# Altium PCB IoT_6LoWPAN_gateway_v01.PcbDoc
Units mm, origin at the board's own origin, x right, y up, seen from the top; angles counter-clockwise.
Board outline 85.03 x 54.05 mm, 2 copper layers (Top, Bottom), stack 1.57 mm thick; 48 components, 55 nets, 189 pads, 17 vias.
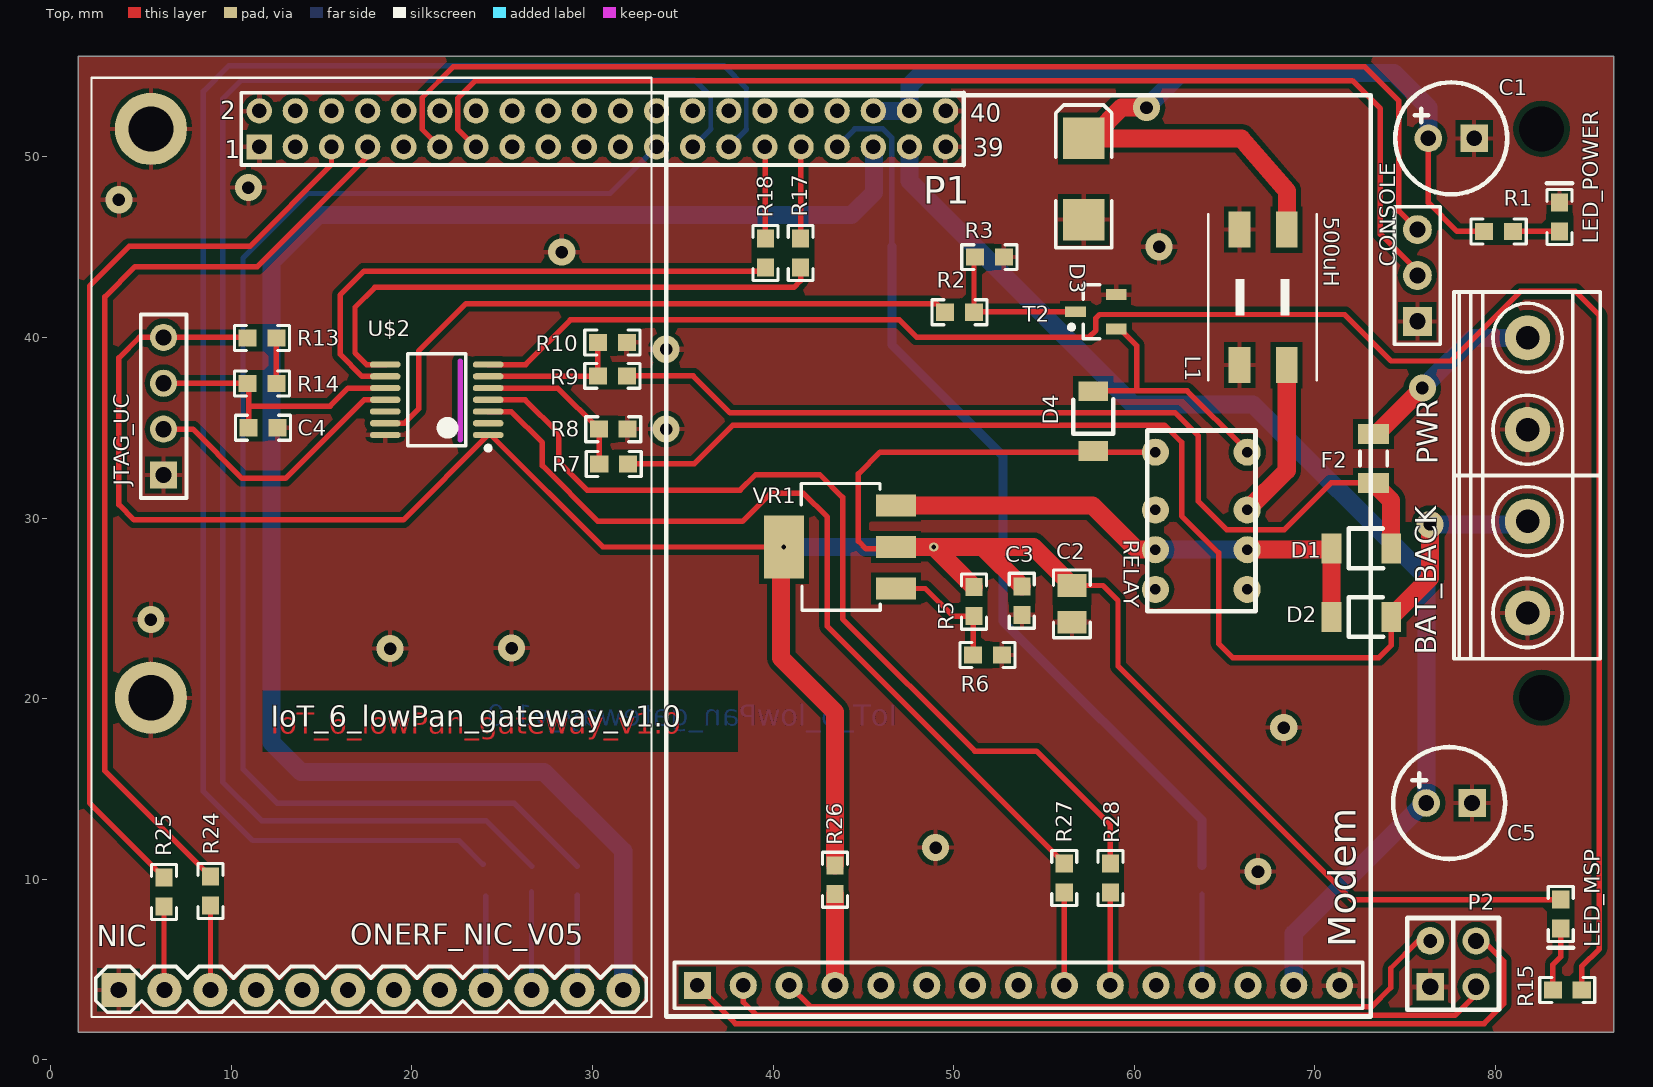
[diagram p0: Top view]
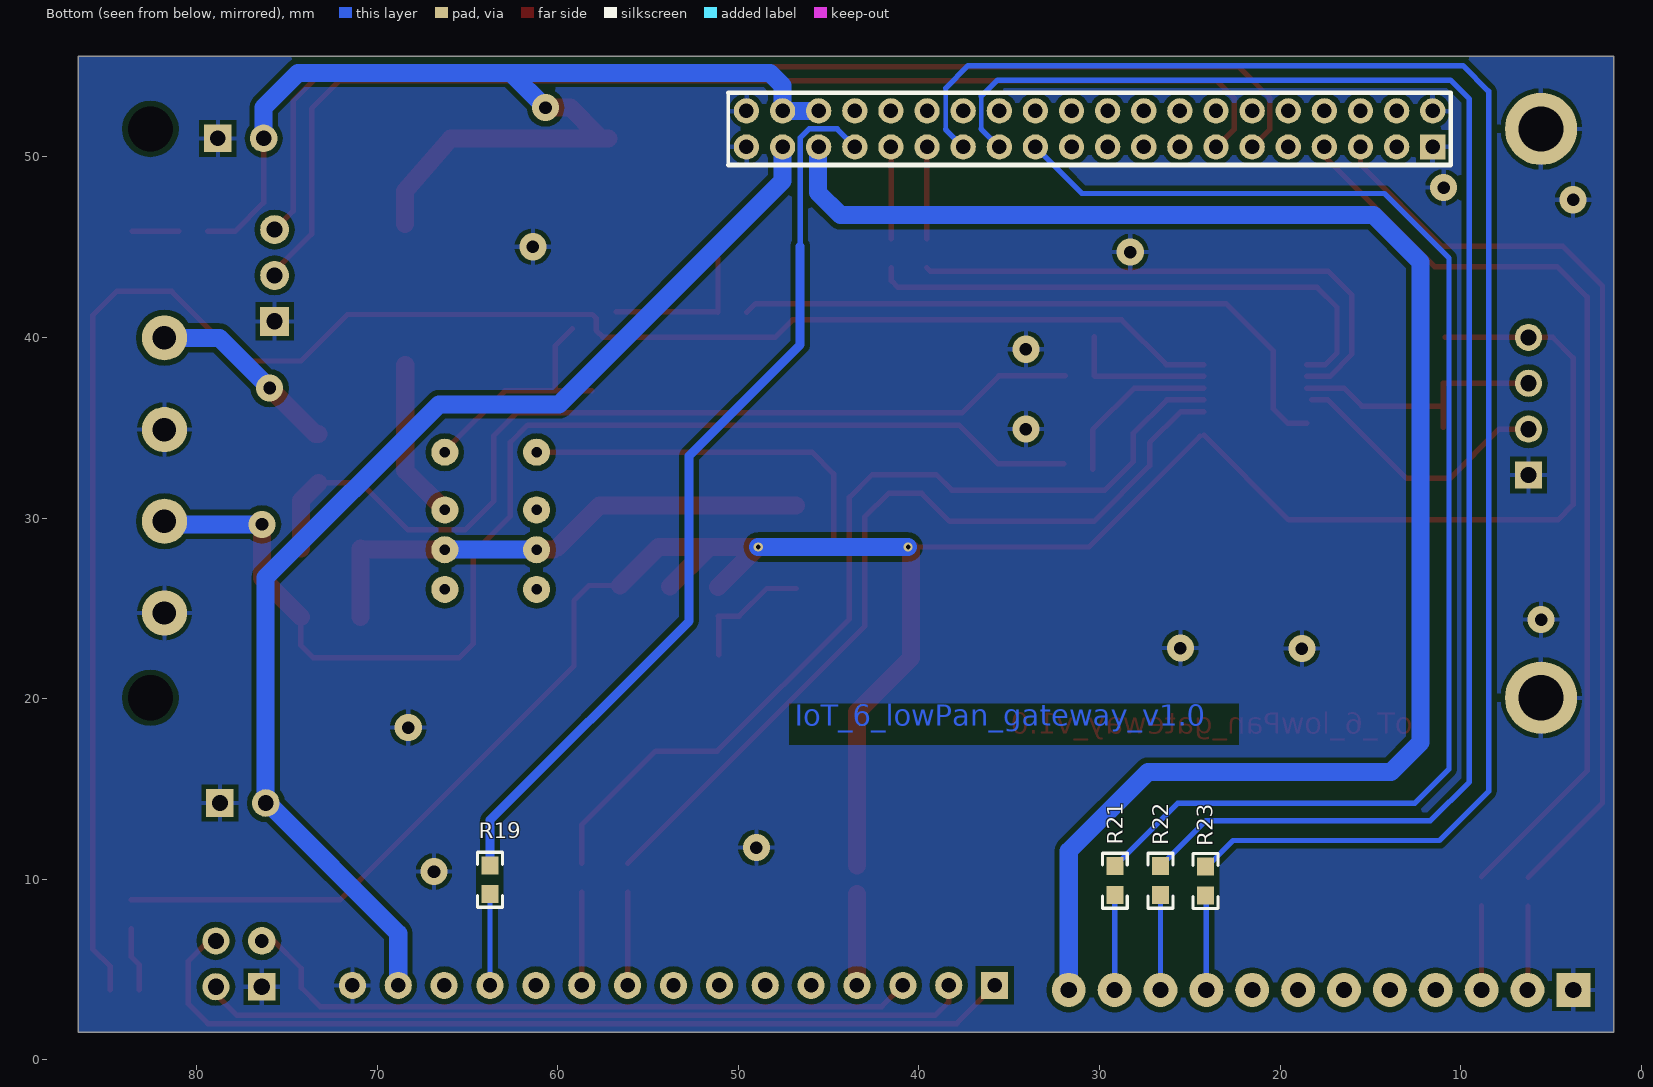
[diagram p1: Bottom view, seen from below]

## Layer stack, top to bottom
Top Solder: solder mask 0.0102, Solder Resist, Dk 3.5
Top: signal copper 0.035
Dielectric 1: core 1.5, FR-4, Dk 4.8
Bottom: signal copper 0.035
Bottom Solder: solder mask 0.0102, Solder Resist, Dk 3.5

## Board outline
1.525,1.525 86.55,1.525 86.55,55.575 1.525,55.575

## Design rules (kind name [scope] priority, off if disabled: settings)
Clearance Clearance_1 [All] p1: gap=0.3
Clearance GroundPlane [InPolygon] p2: gap=0.5
Clearance "Clearance (Same Net)" [All] p3: gap=0.3
HoleSize HoleSize_1 [All] p1: absolutevalues=TRUE maxlimit=2540 minlimit=0.381 maxpercent=80.000 minpercent=20.000
HoleSize [All] p2: absolutevalues=TRUE maxlimit=2.54 minlimit=0.025 maxpercent=80.000 minpercent=20.000
HoleToHoleClearance mdViaViaSameLayer [All] p1: gap=0.203 allowstackedmicrovias=TRUE
HoleToHoleClearance [All] p2: gap=0.254 allowstackedmicrovias=TRUE
PasteMaskExpansion mlMinCreamFrame [All] p1: expansion=0
PasteMaskExpansion [All] p2: expansion=0
PlaneClearance [All] p1: clearance=0.5
PolygonConnect ThermalVias [IsVia] p1: connectstyle=Relief reliefconductorwidth=0.254 reliefentries=4 polygonreliefangle="90 Angle" airgapwidth=0.254
PolygonConnect [All] p2: connectstyle=Relief reliefconductorwidth=0.254 reliefentries=4 polygonreliefangle="90 Angle" airgapwidth=0.254
RoutingVias [All] p1: holewidth=0.711 width=1.27 viastyle="Through Hole" minholewidth=0.711 minwidth=1.27 maxholewidth=0.711 maxwidth=1.27
SilkToSilkClearance [All] p1 off: silktosilkclearance=0.254
SilkToSolderMaskClearance [IsPad] p1 off: minsilkscreentomaskgap=0.254 clearancetoexposedcopper=TRUE
SolderMaskExpansion mlMinStopFrame [All] p1: expansion=0.051
SolderMaskExpansion [All] p2: expansion=0.102
Width Width_1 [All] p1: maxlimit=2540 minlimit=0.3 preferedwidth=0.3
Width [All] p2 off: maxlimit=0.254 minlimit=0.254 preferedwidth=0.254
24 further rules are at their usual default settings.

## Components (designator, comment, footprint, x,y, rotation, side; value= is the part's Value field where it differs from the comment)
BAT_BACK "MKDSN1,5/2-5,08" MKDSN1,5/2-5,08 81.75,27.264 r270 top
C1 "470uF/10V/105C" E2,5-6,3 77.55,51.025 r0 top
C2 "C2012X5R1C226K125AC" 0805_HV 56.55,25.25 r270 top
C3 "CL10B222KB8SFNC" 0603 53.775,25.425 r90 top
C4 "0.1uF" 0603 11.75,35 r0 top
C5 "470uF/10V/105C" E2,5-6,3 77.43,14.225 r0 top
CONSOLE "Header 3" HDR1X3 75.675,40.895 r90 top
D1 "Diode" SOD-80 72.575,28.325 r180 top
D2 "Diode" SOD-80 72.575,24.525 r180 top
D3 "Diode TVS" SMB 57.2,48.775 r90 top
D4 "Diode" SOD-80 57.725,35.375 r270 top
F2 "2A Fast" C1206 73.25,33.3 r270 top
JTAG_UC "CONECTOR_1X042.54MM" HDR1X4 6.25,32.385 r90 top
L1 "500uH" WE-SL2_74422... 67.1,42.225 r90 top
LED_MSP "LED/WHITE/0603" LED0603 83.55,8.887 r180 top
LED_POWER "LED/Red/0603" LED0603 83.61,45.863 r0 top
Modem "oneRF_Modem_v01" ONERF_MODEM_V01 35.81,4.125 r0 top (schematic designator Mod)
NIC "ONERF_NIC_V05" ONERF_NIC_V05 2.265,2.375 r0 top
P1 "Header 20X2" HDR2X20 11.55,50.55 r0 top
P2 "Header 2x2 2.54" HEADER2X2(2.54) 76.385,4.05 r0 top
PWR "MKDSN1,5/2-5,08" MKDSN1,5/2-5,08 81.75,37.419 r270 top
R1 "CRCW06031K00FKEA" 0603 80.175,45.875 r180 top
R2 "CRCW06031K00FKEA" 0603 50.325,41.4 r180 top
R3 "CRCW06031K00FKEA" 0603 51.975,44.45 r180 top
R5 "CRCW06031K00FKEA" 0603 51.125,25.375 r270 top
R6 "RC0603FR-071K6L" 0603 51.875,22.425 r0 top
R7 "CRCW06031K00FKEA" 0603 31.175,33 r0 top
R8 "CRCW06031K00FKEA" 0603 31.15,34.925 r180 top
R9 "CRCW06031K00FKEA" 0603 31.1,37.875 r0 top
R10 "CRCW06031K00FKEA" 0603 31.1,39.725 r180 top
R13 "CRCW06031K00FKEA" 0603 11.7,39.975 r180 top
R14 "CRCW06031K00FKEA" 0603 11.7,37.45 r0 top
R15 "CRCW06031K00FKEA" 0603 83.975,3.875 r180 top
R17 "CRCW06031K00FKEA" 0603 41.525,44.675 r270 top
R18 "CRCW06031K00FKEA" 0603 39.575,44.675 r270 top
R19 "CRCW06031K00FKEA" 0603 63.752,9.975 r270 bottom
R21 "CRCW06031K00FKEA" 0603 29.152,9.925 r270 bottom
R22 "CRCW06031K00FKEA" 0603 26.627,9.925 r270 bottom
R23 "CRCW06031K00FKEA" 0603 24.127,9.9 r270 bottom
R24 "CRCW06031K00FKEA" 0603 8.85,9.35 r270 top
R25 "CRCW06031K00FKEA" 0603 6.275,9.3 r270 top
R26 "CRCW06031K00FKEA" 0603 43.425,9.975 r270 top
R27 "CRCW06031K00FKEA" 0603 56.125,10.075 r270 top
R28 "CRCW06031K00FKEA" 0603 58.675,10.075 r270 top
RELAY "1-1462039-5" 1-1462039-5 61.17,33.65 r270 top
T2 "BC817-40" SOT23_N 57.875,41.425 r180 top
U$2 "MSP430G2231" PW014_N 21.375,36.55 r180 top
VR1 "Voltage Regulator" SOT223 46.769,26.135 r90 top

## Footprints (in the part's own frame and the unit in brackets; to place one, negate y for a bottom-side part, rotate by r counter-clockwise, add the part's x,y. Pads: shape width x height; smd on the part's side, far side on the other; paste and mask are expansions set on the pad)
1-1462039-5 [mm] "Rele 1-1462039-5"
  round 1.5 hole 0.58: 1(0,0) 2(3.2,0) 3(5.4,0) 4(7.6,0) 5(7.6,5.08) 6(5.4,5.08) 7(3.2,5.08) 8(0,5.08)
  silkscreen extent -1.2,-0.46 8.8,5.54
0603 [mm]
  rect 1x0.95 smd: 1(-0.8,0) 2(0.8,0)
  silkscreen extent -1.52,-0.69 1.52,0.69, body extent -0.87,-0.47 0.87,0.47, height 0.85
0805_HV [mil]
  rect 50x63 smd: 1(-40,0) 2(40,0)
  silkscreen extent -74,-40 74,40, body extent -43,-29 43,29, height 43
C1206 [mm] "Chip Capacitor, Body 3.2x1.6mm, IPC High Density"
  rect 1.1x1.7 smd: 1(-1.35,0) 2(1.35,0)
  silkscreen extent -0.4,-0.75 0.4,0.75, body extent -1.7,-0.9 1.7,0.9, height 1.3
E2,5-6,3 [mil] "E2,5-6,3"
  round 60 hole 34: +(-50,0)
  rect 60x60 hole 34: -(50,0)
  silkscreen extent -122,-122 122,122
HDR1X3 [mm] "Connector; Header; 3 Position"
  rect 1.6x1.6 hole 0.9: 1(0,0)
  round 1.6 hole 0.9: 2(2.54,0) 3(5.08,0)
  silkscreen extent -1.27,-1.27 6.35,1.27
HDR1X4 [mm] "Connector; Header; 4 Position"
  rect 1.5x1.5 hole 0.9: 1(0,0)
  round 1.5 hole 0.9: 2(2.54,0) 3(5.08,0) 4(7.62,0)
  silkscreen extent -1.27,-1.27 8.89,1.27
HDR2X20 [mm] "Connector; Header; 20x2 Position"
  rect 1.4x1.4 hole 0.8: 1(0,0)
  round 1.4 hole 0.8: 2(0,2) 3(2,0) 4(2,2) 5(4,0) 6(4,2) 7(6,0) 8(6,2) 9(8,0) 10(8,2) 11(10,0) 12(10,2) 13(12,0) 14(12,2) 15(14,0) 16(14,2) 17(16,0) 18(16,2) 19(18,0) 20(18,2) 21(20,0) 22(20,2) 23(22,0) 24(22,2) 25(24,0) 26(24,2) 27(26,0) 28(26,2) 29(28,0) 30(28,2) 31(30,0) 32(30,2) 33(32,0) 34(32,2) 35(34,0) 36(34,2) 37(36,0) 38(36,2) 39(38,0) 40(38,2)
  silkscreen extent -1,-1 39,3
HEADER2X2(2.54) [mm]
  rect 1.5x1.5 hole 0.9: 1(0,0)
  round 1.524 hole 0.762: 2(0,2.54)
  round 1.5 hole 0.9: 3(2.54,0) 4(2.54,2.54)
  silkscreen extent -1.27,-1.27 3.81,3.81
LED0603 [mm]
  rect 0.95x1 smd: 1(-0.06,0.012) 2(-0.06,1.612)
  silkscreen extent -0.76,-0.71 0.63,2.67, body extent -0.53,-0.06 0.41,1.69, height 0.85
MKDSN1,5/2-5,08 [mm] "MKDSN1,5/2-5,08"
  round 2.5 hole 1.3: 1(-2.561,0.025) 2(2.519,0.025)
  silkscreen extent -5.1,-4.05 5.06,4.05
ONERF_MODEM_V01 [mm] "oneRF_Modem_v01"
  rect 1.5x1.5 hole 0.8: 1(0,0)
  round 1.5 hole 0.8: 2(2.54,0) 3(5.08,0) 4(7.62,0) 5(10.16,0) 6(12.7,0) 7(15.24,0) 8(17.78,0) 9(20.32,0) 10(22.86,0) 11(25.4,0) 12(27.94,0) 13(30.48,0) 14(33.02,0) 15(35.56,0)
  silkscreen extent -1.72,-1.72 37.28,49.28
ONERF_NIC_V05 [mil] "ONERF_NIC_V05"
  rect 74x74 hole 35.43: 0(59.06,59.06)
  round 74 hole 35.43: 1(159.06,59.06) 2(259.06,59.06) 3(359.06,59.06) 4(459.06,59.06) 5(559.06,59.06) 6(659.06,59.06) 7(759.06,59.06) 8(859.06,59.06) 9(959.06,59.06) 10(1059.06,59.06) 11(1159.06,59.06)
  silkscreen extent 0,0 1220,2047
PW014_N [mm] "TSOP, 14-Leads, Body 5x4.4mm, Pitch 0.65mm, IPC Medium Density"
  oval 1.7x0.35 smd: 1(-2.85,1.95) 2(-2.85,1.3) 3(-2.85,0.65) 4(-2.85,0) 5(-2.85,-0.65) 6(-2.85,-1.3) 7(-2.85,-1.95) 8(2.85,-1.95) 9(2.85,-1.3) 10(2.85,-0.65) 11(2.85,0) 12(2.85,0.65) 13(2.85,1.3) 14(2.85,1.95)
  silkscreen extent -2.98,-2.55 1.6,2.8, body extent -2.25,-2.55 2.25,2.55, height 1.2
SMB [mm] "DO-214-AA/SMB; 2 C-Bend Leads; Body 5.3 x 3.6 mm, inc. leads (LxW)"
  rect 2.3x2.3 smd: 1(-2.25,0) 2(2.25,0)
  silkscreen extent -3.8,-1.55 4.1,1.55
SOD-80 [mm]
  rect 1.1x1.65 smd: 1(-1.65,0) 2(1.65,0)
  silkscreen extent -1.2,-1.1 0.7,1.1, body extent -1.86,-1.5 1.79,1.5, height 3.5
SOT23_N [mm] "SOT23, 3-Leads, Body 2.9x1.3mm, Pitch 0.95mm, Lead Span 2.3mm - Reverse Pinning, IPC Medium Density"
  rect 1.15x0.6 smd: 1(1.125,0) 2(-1.125,-0.95) 3(-1.125,0.95)
  silkscreen extent -0.2,-1.5 1.47,1.5, body extent -0.7,-1.5 0.7,1.5, height 1.1
SOT223 [mm] "SOT223 - Regulador"
  rect 1.2x2.2 smd: 1(-0.035,-0.031) 2(2.265,-0.031) 3(4.565,-0.031)
  rect 3.5x2.2 smd: 2(2.265,6.169)
  silkscreen extent -1.23,0.83 5.78,5.2, body extent -0.97,-0.6 5.43,6.72, height 1.8
WE-SL2_74422... [mm] "WE-SL2_74422..."
  rect 2x1.2 smd: 1(-3.75,1.27) 2(-3.75,-1.34) 3(3.75,-1.34) 4(3.75,1.27)
  silkscreen extent -4.6,-3 4.6,3

## Part data
BAT_BACK PWR: "MKDSN 1,5/ 2-5,08 Printklemme   Nennstrom: 13,5 A Nennspannung: 250 V Rastermaß: 5,08 mm Polzahl: 2 Anschlussart: Schraubanschluss Montage: Löten Anschlussrichtung Leiter/Platine: 0 ° Artikelnummer: 1729128 Source: http://eshop.phoenixcontact.com .. 1729128.pdf"
C1 C5: library part CPOL-EUE2.5-6.3, "POLARIZED CAPACITOR, European symbol"
C2: "CAP, CERM, 22 µF, 16 V, +/- 10%, X5R, 0805"
C3: library part C1005X7R1H222K, "CAP, CERM, 2200 pF, 50 V, +/- 10%, X7R, 0603"
C4: library part C-EUC0603_DWS, "CAPACITOR, European symbol"
CONSOLE: "Header, 3-Pin"
D1 D2 D4: "Diode, 100v, 1V, 200mA, -65º, 175º, SMT"
D3: library part "D Schottky", "Schottky Diode"
F2: library part PTCSMD-W, "Resettable Fuse PTCResettable Fuse. Spark Fun Electronics SKU : COM-08357"
L1: library part WE-SL2, "SMD Common-Mode Choke for signal lines WE-SL2 For distortion-free removal of noise from transmitted electrical signals - Double current-compensated choke -- Current compensated choke for data and signal lines -- Power supply systems -- Filter for measurement signals"
LED_MSP: library part LED0603_WWS
LED_POWER: library part LED0603DWS
Modem: library part "Header 15", "CONN HEADER .100\" SNGL STR 15POS"
P1: "Header, 20-Pin, Dual row"
P2: library part HEADER2x2(2.54)
R1 R2 R3 R5 R7 R8 R9 R10 R13 R14 R15 R17 R18 R19 R21 R22 R23 R24 R25 R26 R27 R28: library part Resistor, "RES, 1kohm, 1%, 1/10W, 0603"
R6: library part Resistor, "RES, 1.6kohm, 1%, 1/10W, 0603"
RELAY: "RELAY"
T2: library part NPN-TRANSISTOR_SOT23, "NPN TRANSISTOR"
U$2: library part G2X[2/3]1---PW14, "MSP430G2X[2/3]1 TSSOP (PW) 14 Pin Package  http://focus.ti.com/docs/prod/folders/print/msp430g2221.html  MSP430G2121, MSP430G2221, MSP430G2131"

## Free pads (board coordinates)
  round 4 hole 2.5: 1(5.55,51.55) 2(5.55,20.05)
  round 0 hole 2.5: 3(82.55,51.55) 4(82.55,20.05)

## Via types
v1: diameter 1.5, hole 0.7, Top to Bottom, 15 vias
v2: diameter 0.508, hole 0.254, Top to Bottom, tented both sides, 2 vias

## Nets (pads, with @x,y where several pads share a name; then routed paths per layer and width w, separated by ;. In a path a pad name is that pad's centre, name@x,y a point inside that pad or via, vN(x,y) a via of type N, cw(c..) or ccw(c..) an arc to the next point about the centre after c; other vN are vias at no path point)
+1.8V: NIC.11 P1.35 | length 93.7
  Bottom w1: NIC.11 31.705,11.57 27.325,15.95 13.85,15.95 12.225,17.575 12.225,44.175 14.825,46.775 44.35,46.775 45.6,48.025 P1.35@45.6,50.5
+5V: C5.+ Modem.14 P1.37 | length 65.2
  Bottom w1: P1.37 47.55,48.675 59.925,36.3 66.575,36.3 76.175,26.7 C5.+@76.175,14.225 ; Modem.14 68.83,7.005 C5.+@76.05,14.225
+12V: D1.2 D2.2 RELAY.3 RELAY.6 VR1.3 | length 28.6
  Top w1: VR1.3 57.675,30.7 60.013,28.362 ; 60.225,28.25 RELAY.3 ; RELAY.6 D1.2@70.85,28.25 ; D2.2 D1.2
  Bottom w1: RELAY.3 RELAY.6
BAT_+12V: BAT_BACK.1 D2.1 R7.2 | length 67.1
  Top w0.3: R7.2 35.625,33 37.775,35.15 61.675,35.15 62.625,34.2 62.625,30.125 64.675,28.075 64.675,23.05 65.45,22.275 73.55,22.275 74.225,22.95 D2.1
  Top w1: D2.1 76.375,26.675 v1(76.375,29.65) v1@76.55,29.825
  Bottom w1: v1(76.375,29.65) BAT_BACK.1@81.6,29.65
COM_GPIO24-NIC_PIN5: LED_MSP.2 R15.2 | length 3.6
  Top w0.3: R15.2 83.175,5.275 83.61,5.71 LED_MSP.2
CTS_CONN: Modem.11
DRAGON_GPIO36-NIC_NRESET: P1.23 R21.1 | length 74.5
  Bottom w0.3: R21.1 25.677,14.2 12.55,14.2 10.65,16.1 10.65,44.4 14.225,47.975 30.975,47.975 P1.23
DRAGON_GPIO115-NIC_PONG: P1.27 R23.1 | length 90.7
  Bottom w0.254: 38.525,51.525 38.525,53.8
  Bottom w0.3: R23.1@23.925,10.825 22.6,12.15 11.175,12.15 8.45,14.875 8.45,53.625 9.875,55.05 37.275,55.05 38.525,53.8 ; P1.27 38.525,51.525
DRAGON_RX-CONSOLE: CONSOLE.2 P1.13 | length 65.1
  Top w0.3: P1.13 22.55,51.525 22.55,53.25 23.525,54.225 72.075,54.225 73.625,52.675 73.625,45.725 CONSOLE.2@75.675,43.675
DRAGON_RX-NIC_TX: P1.7 R24.1 | length 52.3
  Top w0.3: R24.1 3,16 3,42.25 4.675,43.925 11.45,43.925 P1.7@17.55,50.025
DRAGON_TX-CONSOLE: CONSOLE.3 P1.11 | length 66.3
  Top w0.3: P1.11 20.575,51.525 20.575,53.275 22.3,55 72.75,55 74.65,53.1 74.65,47 CONSOLE.3
DRAGON_TX-NIC_RX: P1.5 R25.1 | length 51.6
  Top w0.3: R25.1 2.15,14.225 2.15,42.85 4.35,45.05 11.025,45.05 15.55,49.575 P1.5
DVCC_MSP: C2.1 C3.2 D4.2 JTAG_UC.4 LED_MSP.1 R5.1 R13.2 R26.1 RELAY.1 U$2.1 VR1.2 | length 160
  Top w0.3: R13.2@10.87,40.005 JTAG_UC.4 4.905,40.005 3.775,38.875 3.775,30.75 4.625,29.9 19.525,29.9 U$2.1 ; U$2.1@24.45,34.525 30.575,28.4 v2(40.6,28.4) ; VR1.2@46.6,28.3 45.15,28.3 44.725,28.725 44.725,32.45 45.925,33.65 RELAY.1 ; C2.1 58.259,26.266 59.1,25.425 59.1,21.8 72.025,8.875 LED_MSP.1
  Top w1: VR1.2@40.45,28.25 40.45,22.25 43.425,19.275 R26.1 ; VR1.2@46.8,28.4 v2(48.9,28.4) ; R5.1 v2(48.9,28.4) ; 51.675,28.325 C3.2 ; C2.1 54.416,28.4 v2(48.9,28.4)
  Bottom w1: v2(40.6,28.4) v2(48.9,28.4)
ENABLE_PWR: Modem.13
FONTE_+12V: D1.1 F2.2 R9.2 | length 52.1
  Top w0.3: R9.2 35.575,37.875 37.625,35.825 62.275,35.825 63.55,34.55 63.55,30.925 65.125,29.35 68.3,29.35 70.9,31.95 F2.2
  Top w1: F2.2 74.225,30.975 D1.1
GND: BAT_BACK.2 C1.- C2.2 C3.1 C4.2 C5.- CONSOLE.1 D3.1 JTAG_UC.1 L1.1 L1.4 LED_POWER.2 Modem.15 NIC.0 P1.1 P1.2 P1.39 P1.40 P2.1 pad.1 pad.2 PWR.2 R3.1 R6.2 R8.1 R10.1 T2.2 U$2.14
  other v1: 66.85,10.425 49,11.75 68.275,18.4 18.8,22.775 25.525,22.8 5.55,24.375 34.075,34.925 34.075,39.35 28.3,44.725 61.375,45.025 3.775,47.625 10.95,48.3
GPIO_02_CONN: Modem.6
GPIO_03_CONN: Modem.5
MSP_PING-DRAGON_GPIO24: P1.29 R18.1 | length 5
  Top w0.3: R18.1 P1.29@39.575,50.525
MSP_PONG-DRAGON_GPIO35: P1.31 R17.1 | length 5
  Top w0.3: R17.1 P1.31@41.525,50.525
MSP_RX-TXD_CONN: Modem.10 R28.2 | length 5.1
  Top w0.3: Modem.10@58.675,4.13 R28.2
MSP_TX-RXD_CONN: Modem.9 R27.2 | length 5.1
  Top w0.3: Modem.9@56.125,4.13 R27.2
NetC4_1: C4.1 JTAG_UC.3 R14.1 U$2.10 | length 15.1
  Top w0.3: JTAG_UC.3 R14.1@10.96,37.465 ; C4.1@10.975,35.025 R14.1@10.975,37.45 ; 11,36.2 15.475,36.2 16.475,37.2 U$2.10
NetD4_1: D4.1 RELAY.8 T2.3 | length 13.1
  Top w0.3: D4.1@58.1,37.05 60.125,37.05 ; T2.3@59.2,40.475 60.125,39.55 60.125,37.05 ; RELAY.8@66.05,33.925 62.925,37.05 60.125,37.05
NetF2_1: F2.1 PWR.1 | length 10.7
  Top w1: F2.1 73.4,34.65 v1(75.95,37.2)
  Bottom w1: v1(75.95,37.2) 78.73,39.98 PWR.1
NetLED_POWER_1: LED_POWER.1 R1.1 | length 2.6
  Top w0.3: R1.1 LED_POWER.1
NetNIC_1: NIC.1 R25.2 | length 4.6
  Top w0.3: NIC.1@6.275,3.905 R25.2
NetNIC_2: NIC.2 R24.2 | length 4.7
  Top w0.3: NIC.2@8.85,3.88 R24.2
NetNIC_8: NIC.8 R23.2 | length 5.2
  Bottom w0.3: NIC.8 R23.2@24.085,9.058
NetNIC_9: NIC.9 R22.2 | length 5.4
  Bottom w0.3: NIC.9 R22.2@26.625,9.325
NetNIC_10: NIC.10 R21.2 | length 5.2
  Bottom w0.3: NIC.10 R21.2@29.165,9.112
NetP1_33: P1.33 R19.1 | length 51
  Bottom w0.3: P1.33@43.55,50.575 44.525,51.55 46.075,51.55 46.575,51.05 46.575,45.05
  Bottom w0.5: 46.575,45.05 46.575,39.6 52.725,33.45 52.725,24.3 63.752,13.273 R19.1
NetR2_1: R2.1 R3.2 T2.1 | length 8.6
  Top w0.3: R2.1 R3.2@51.125,44.4 ; R2.1@51.15,41.425 T2.1
NetR5_2: R5.2 R6.1 VR1.1 | length 7.1
  Top w0.3: VR1.1 48.425,26.1 49.95,24.575 R5.2 ; R6.1 R5.2@51.075,24.525
NetR13_1: R13.1 R14.2 | length 2.5
  Top w0.3: R14.2 R13.1
NetR15_1: R15.1 U$2.7 | length 104.8
  Top w0.3: U$2.7 26.3,38.5 28.775,40.975 47,40.975 47.95,40.025 57.5,40.025 57.875,40.4 57.875,41.075 58.075,41.275 71.65,41.275 74.225,38.7 77.525,38.7 81.375,42.55 84.425,42.55 85.75,41.225 85.75,6.15 84.775,5.175 R15.1
NetR17_2: R17.2 U$2.8 | length 30.5
  Top w0.3: U$2.8 17.5,38.5 16.85,39.15 16.85,41.675 17.95,42.775 41.15,42.775 41.525,43.15 R17.2
NetR18_2: R18.2 U$2.9 | length 30.5
  Top w0.3: U$2.9 17.25,37.85 16.025,39.075 16.025,42.35 17.35,43.675 39.375,43.675 R18.2
NetR27_1: R27.1 U$2.3 | length 47.8
  Top w0.3: U$2.3 25.5,35.9 27.225,34.175 27.225,32.9 30.3,29.825 38.3,29.825 39.85,31.375 41.675,31.375 43,30.05 43,24 R27.1
NetR28_1: R28.1 U$2.4 | length 51.9
  Top w0.3: U$2.4 26.275,36.55 28.125,34.7 28.125,33.125 29.7,31.55 38.175,31.55 39.025,32.4 42.6,32.4 43.85,31.15 43.85,24.425 51.175,17.1 54.575,17.1 58.675,13 R28.1
NIC_PING-DRAGON_GPIO13: P1.25 R22.1 | length 87.9
  Bottom w0.254: 36.55,51.55 36.55,53.35
  Bottom w0.3: R22.1 24.102,13.25 11.675,13.25 9.525,15.4 9.525,53.2 10.575,54.25 35.65,54.25 36.55,53.35 ; P1.25 36.55,51.55
NIVEL_BATERIA: R7.1 R8.2 U$2.5 | length 9.3
  Top w0.3: U$2.5 28.075,37.2 R8.2 30.375,34.9 R7.1 R7.1@30.375,32.7
NIVEL_FONTE: R9.1 R10.2 U$2.6 | length 8.2
  Top w0.3: U$2.6 R9.1@30.275,37.85 ; R9.1 R10.2@30.3,40.05
ON_OFF: Modem.12 R19.2 | length 5
  Bottom w0.3: Modem.12 R19.2@63.75,9.173
REL1_NC: L1.2 RELAY.7 | length 8.9
  Top w1: RELAY.7 68.44,32.64 L1.2
REL1_NO: RELAY.5
RELAY: R2.2 U$2.13 | length 35.8
  Top w0.3: U$2.13 19.575,35.25 20.375,36.05 20.375,39.25 23,41.875 49.05,41.875 R2.2
RTS_CONN: Modem.8
STAT_LED_CONN: Modem.7
SYS_DCIN: C1.+ D3.2 L1.3 P1.36 P1.38 R1.2 | length 62.8
  Top w0.3: C1.+ 76.28,47.47 77.875,45.875 R1.2
  Top w1: D3.2 65.925,51.025 68.45,48.1 L1.3@68.45,46.275 ; D3.2@57.85,51.275 59.3,52.725 v1(60.675,52.725)
  Bottom w1: P1.36 P1.38 47.55,53.95 48.25,54.65 62.6,54.65 ; v1(60.675,52.725) 62.6,54.65 ; C1.+ 76.28,52.745 74.375,54.65 62.6,54.65
TCK_AFE: JTAG_UC.2 U$2.11 | length 14.9
  Top w0.3: JTAG_UC.2 7.875,34.925 10.6,32.2 13,32.2 17.35,36.55 U$2.11@18.25,36.55
USB_D+: Modem.2 P2.3 | length 42.3
  Top w0.3: Modem.2 38.35,3.2 39.1,2.47 77.75,2.47 P2.3@78.925,3.625
USB_D-: Modem.3 P2.2 | length 37.4
  Top w0.3: Modem.3 42.065,2.95 73.15,2.95 74.2,4 74.2,5.075 P2.2@75.715,6.59
VCC_LVL_TRANS: Modem.4 R26.2 | length 4.8
  Top w1: Modem.4@43.425,4.4 R26.2
VUSB: Modem.1 P2.4 | length 49.9
  Top w0.3: Modem.1 37.91,2.025 ; 37.91,1.995 79.375,1.995 ; P2.4@79.335,6.59 80.45,5.475 80.45,3.1 79.375,2.025
pads on no net: NIC.3 NIC.4 NIC.5 NIC.6 NIC.7 P1.3 P1.4 P1.6 P1.8 P1.9 P1.10 P1.12 P1.14 P1.15 P1.16 P1.17 P1.18 P1.19 P1.20 P1.21 P1.22 P1.24 P1.26 P1.28 P1.30 P1.32 P1.34 RELAY.2 RELAY.4 U$2.2 U$2.12
copper on no net: | length 3.1
  Top w0.3: 17.55,50.025 17.55,50.55 ; 60.97,28.45 61.17,28.25 ; 66.05,33.925 66.1,33.925 ; 75.675,43.435 75.675,43.675 ; 75.715,6.59 76.385,6.59 ; 78.925,3.625 78.925,4.05 78.925,3.7 ; 78.925,6.59 79.335,6.59
  Bottom w0.3: 23.925,10.825 23.95,10.825 ; 76.05,14.225 76.16,14.225

## Polygon pours and split planes (outlines as drawn)
GND on Bottom "Bottom-GND" (solid, remove dead copper, pour order 6): 1.525,1.525 86.55,1.525 86.55,55.575 1.525,55.575
GND on Top "Top-GND" (solid, remove dead copper, pour order 14): 1.525,1.525 86.55,1.525 86.55,55.575 1.525,55.575

## Keep-outs
Top:
  lines w0.3: 22.675,34.325 22.675,38.7

## Other copper
Top:
  text "IoT_6_lowPan_gateway_v1.0" at 12.175,17.684 h2
Bottom:
  text "IoT_6_lowPan_gateway_v1.0" at 46.875,18.125 h2

## Silkscreen, mask and mechanical layers (free items; w line width, h text height)
Top Overlay:
  text "IoT_6_lowPan_gateway_v1.0" at 12.173,18.057 h2
Mechanical 5:
  lines w0.254: 1.55,1.55 1.55,55.55 86.55,55.55 86.55,1.55 1.55,1.55

## Text inside footprints (layer, text, board x,y; h text height)
P1: Top Overlay "1" at 9.645,49.915 h1; Top Overlay "2" at 9.391,52.074 h1; Top Overlay "40" at 50.92,51.947 h1; Top Overlay "39" at 51.047,50.042 h1